# EAGLE board audio_spectrum (EAGLE 6.6.0)
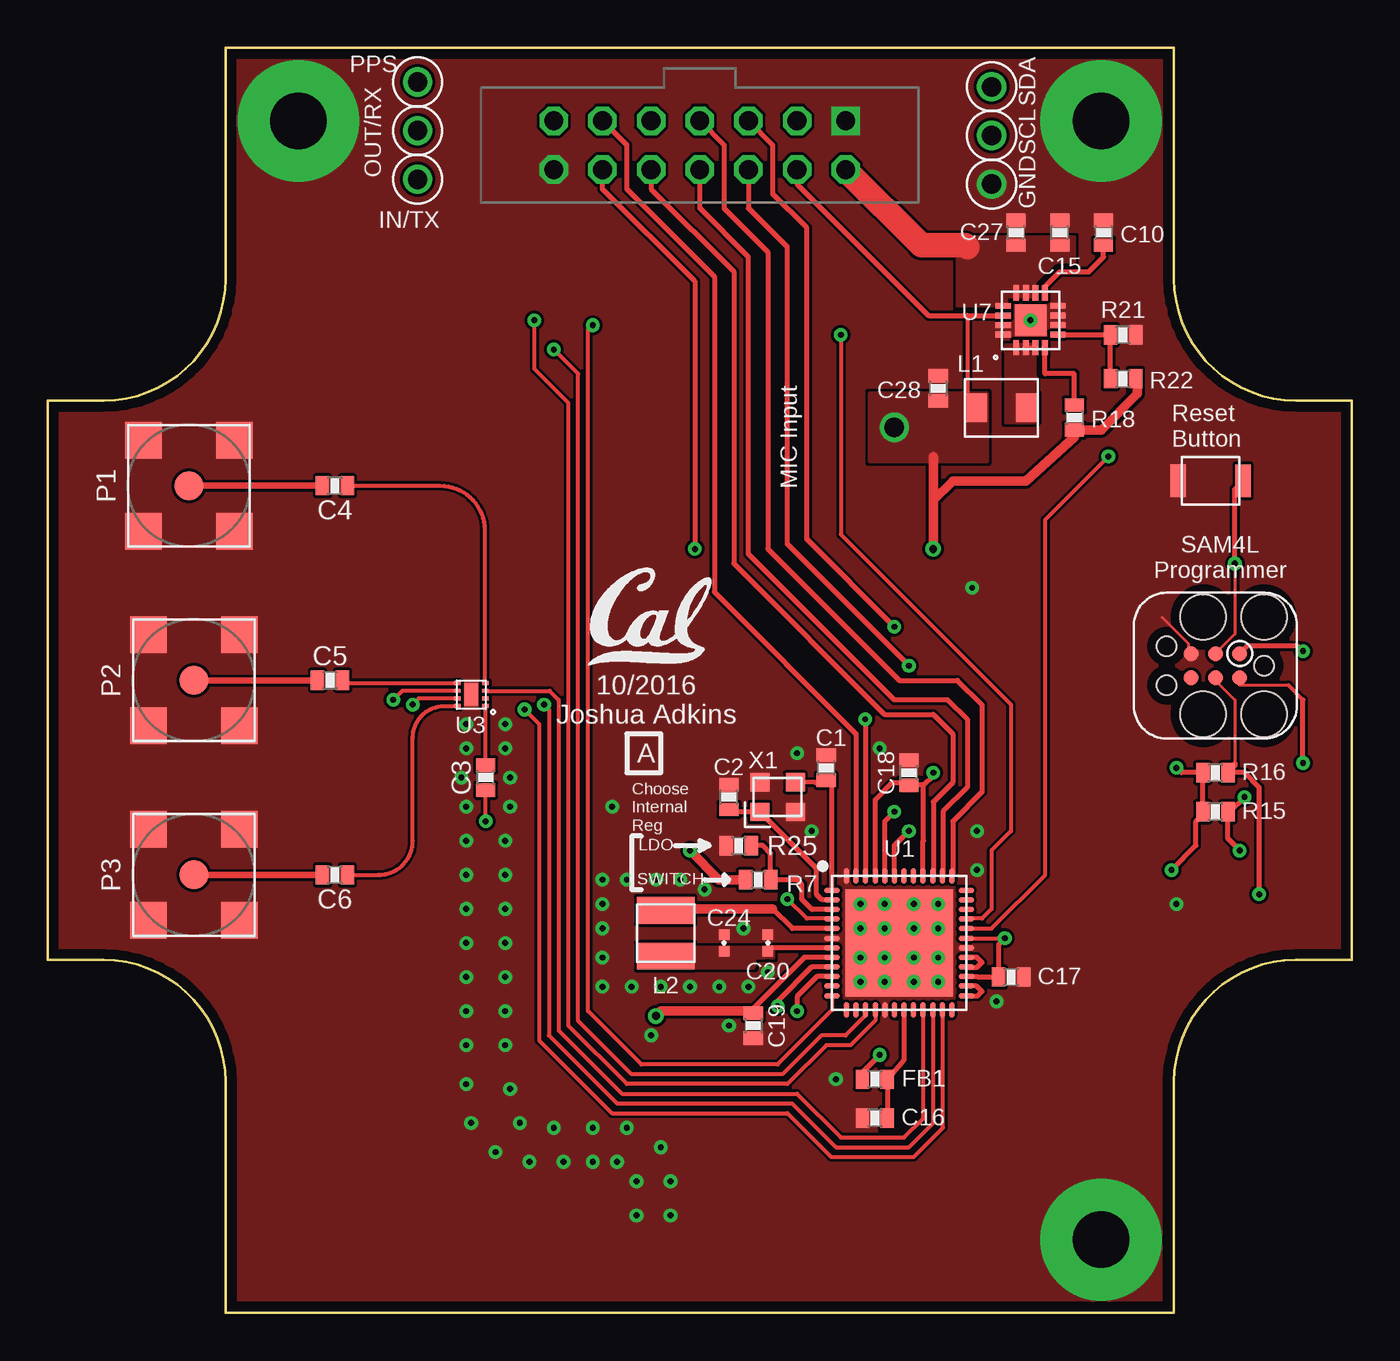
[diagram p0: board, top side]
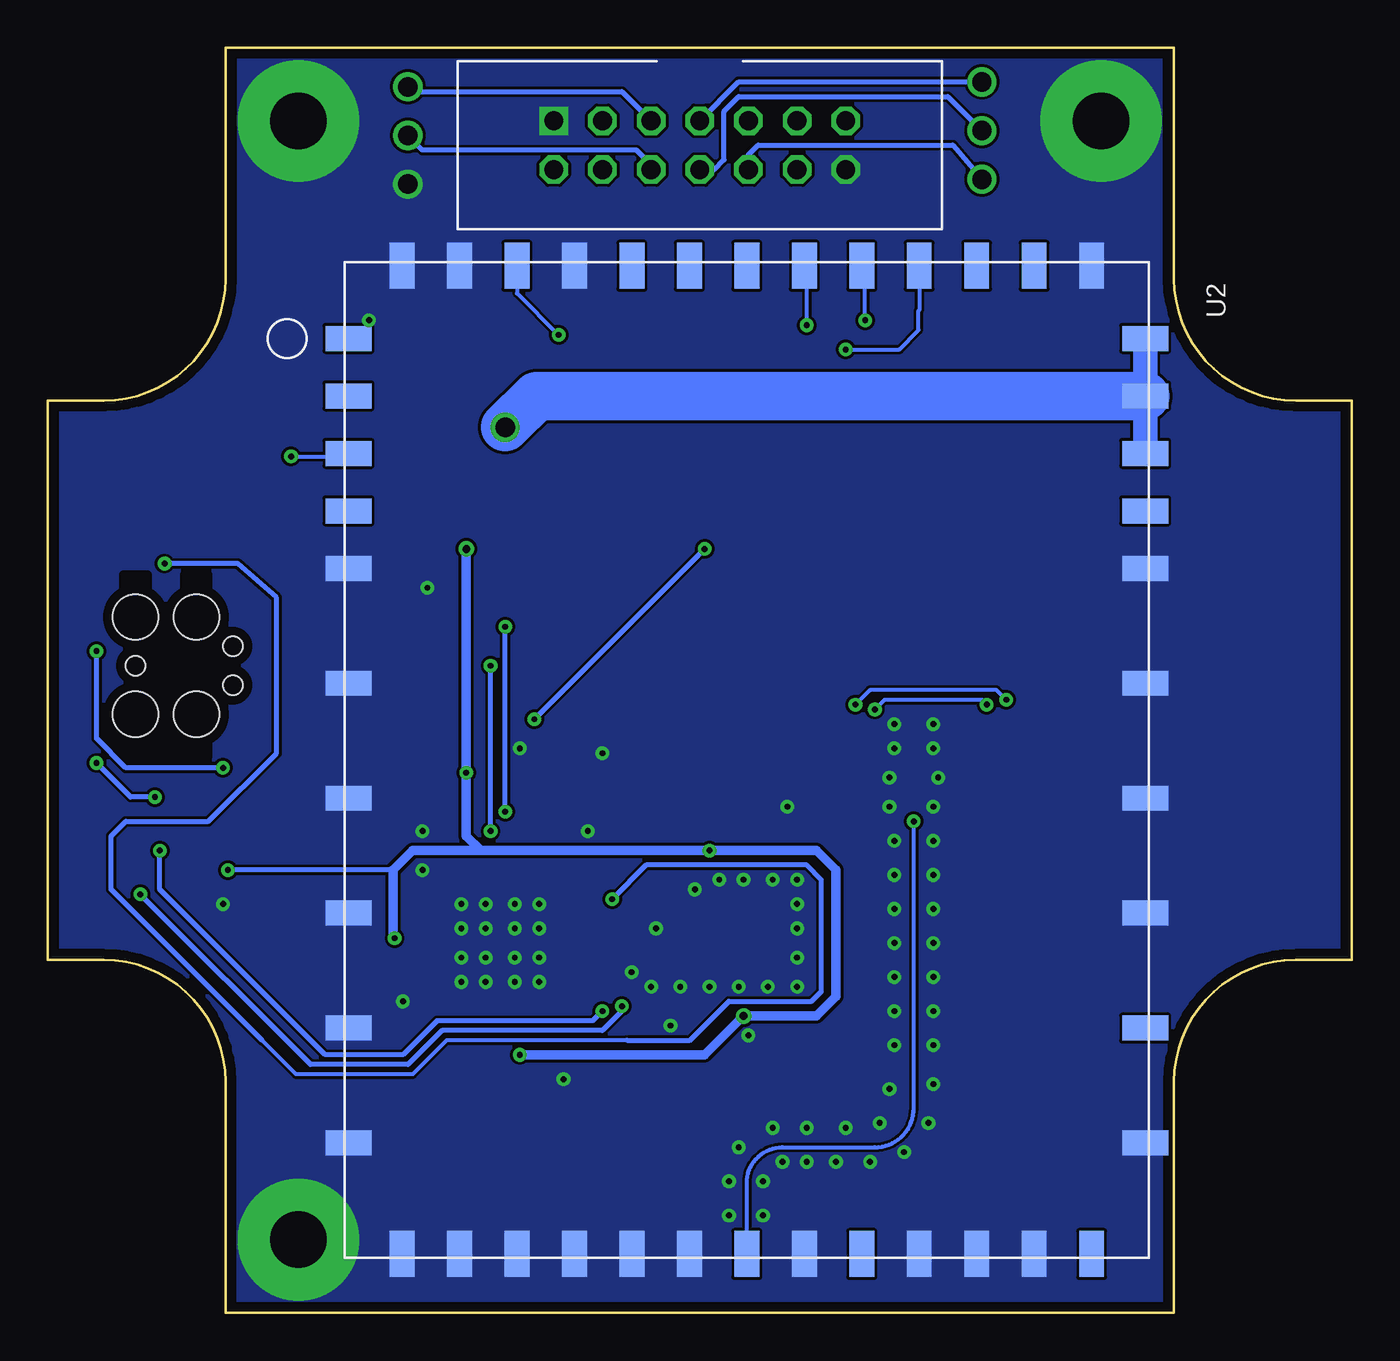
[diagram p1: board, bottom side, seen from below]

Size 68.07 x 66.04 mm. Coordinates in mm from the lower left corner, seen from the top.
Outline: 9.27,66.04 58.8,66.04 58.8,53.98 arc90 65.15,47.62 68.07,47.62 68.07,18.41 65.15,18.41 arc90 58.8,12.07 58.8,0 9.27,0 9.27,12.07 arc90 2.92,18.41 0,18.41 0,47.62 2.92,47.62 arc90 9.27,53.98 9.27,66.04
Copper layers (1*16): Top 0.0178mm / dielectric 59mil / Bottom 0.0178mm
Design rules "quickturn_co_kr_1oz": minimum track width 4mil, minimum drill 0.200659375mm, track to track 4mil, track to pad 4mil, pad to pad 4mil, via to via 4mil, smd to smd 4mil, copper to edge 20mil, drill to drill 16mil, minimum pad ring 8mil, minimum via ring 8mil, stop-mask expansion 3mil, vias tented up to drill 50mil, thermal gap 10mil

## Footprints (pad centres in the part's own frame; a part is rotated, then mirrored left to right if it is on the bottom)
0603_CAP = smd 0.7 x 1: 1 -0.65,0; 2 0.65,0
0402_CAP = smd 0.536 x 0.546: 1 -0.433,0; 2 0.433,0
MODULE_GENERIC = drill 0.991 square: 1 7.62,29.21 | drill 0.991 octagon: 2 7.62,26.67; 3 5.08,29.21; 4 5.08,26.67; 5 2.54,29.21; 6 2.54,26.67; 7 0,29.21; 8 0,26.67; 9 -2.54,29.21; 10 -2.54,26.67; 11 -5.08,29.21; 12 -5.08,26.67; 13 -7.62,29.21; 14 -7.62,26.67
TC2030-IDC = smd 0.787 x 0.787: 1 -1.27,-0.635; 2 -1.27,0.635; 3 0,-0.635; 4 0,0.635; 5 1.27,-0.635; 6 1.27,0.635 | hole 2.375: -2.54,2.54; 0.635,2.54; 0.635,-2.54; -2.54,-2.54 | hole 1.016: -2.54,0; 2.54,1.016; 2.54,-1.016
IHL-1212BZ-11 = smd 1.2 x 1.5: P$1 -1.35,0; P$2 1.35,0
1212 = smd 1.4 x 3: P$1 -1.2,0; P$2 1.2,0
SMA-J/PCB = smd 1.52 x 1.52: 1 0,0 | smd 1.91 x 1.91: 2 -2.375,-2.375; 3 2.375,-2.375; 4 2.375,2.375; 5 -2.375,2.375
0603-RES = smd 0.7 x 1: 1 -0.65,0; 2 0.65,0
B3U-1000P = smd 0.8 x 1.7: 1 -1.7,0; 2 1.7,0
TESTPOINT_0.040IN = drill 1.016: TESTPOINT 0,0
QFN-48-7MM = smd 0.8 x 0.28: 1 -3.5,2.75; 2 -3.5,2.25; 3 -3.5,1.75; 4 -3.5,1.25; 5 -3.5,0.75; 6 -3.5,0.25; 7 -3.5,-0.25; 8 -3.5,-0.75; 9 -3.5,-1.25; 10 -3.5,-1.75; 11 -3.5,-2.25; 12 -3.5,-2.75; 25 3.5,-2.75; 26 3.5,-2.25; 27 3.5,-1.75; 28 3.5,-1.25; 29 3.5,-0.75; 30 3.5,-0.25; 31 3.5,0.25; 32 3.5,0.75; 33 3.5,1.25; 34 3.5,1.75; 35 3.5,2.25; 36 3.5,2.75 | smd 0.28 x 0.8: 13 -2.75,-3.5; 14 -2.25,-3.5; 15 -1.75,-3.5; 16 -1.25,-3.5; 17 -0.75,-3.5; 18 -0.25,-3.5; 19 0.25,-3.5; 20 0.75,-3.5; 21 1.25,-3.5; 22 1.75,-3.5; 23 2.25,-3.5; 24 2.75,-3.5; 37 2.75,3.5; 38 2.25,3.5; 39 1.75,3.5; 40 1.25,3.5; 41 0.75,3.5; 42 0.25,3.5; 43 -0.25,3.5; 44 -0.75,3.5; 45 -1.25,3.5; 46 -1.75,3.5; 47 -2.25,3.5; 48 -2.75,3.5 | smd 5.6 x 5.6: THERMAL 0,0
MWSUB3G = smd 1.3 x 2.4: P$1 4,0.2; P$2 7,0.2; P$3 10,0.2; P$4 13,0.2; P$5 16,0.2; P$6 22,0.2; P$7 28,0.2; P$8 34,0.2; P$9 40,0.2; P$10 46,0.2; P$24 46,41.8; P$25 40,41.8; P$26 34,41.8; P$27 28,41.8; P$28 22,41.8; P$29 16,41.8; P$30 13,41.8; P$31 10,41.8; P$32 7,41.8; P$33 4,41.8 | smd 2.4 x 1.3: P$11 51.8,3; P$12 51.8,6; P$13 51.8,9; P$14 51.8,12; P$15 51.8,15; P$16 51.8,18; P$17 51.8,21; P$18 51.8,24; P$19 51.8,27; P$20 51.8,30; P$21 51.8,33; P$22 51.8,36; P$23 51.8,39; P$34 0.2,39; P$35 0.2,36; P$36 0.2,33; P$37 0.2,30; P$38 0.2,27; P$39 0.2,24; P$40 0.2,21; P$41 0.2,18; P$42 0.2,15; P$43 0.2,12; P$44 0.2,9; P$45 0.2,6; P$46 0.2,3
XDFN-8 = smd 0.35 x 0.2: 1 0.025,1.35; 2 0.025,0.95; 3 0.025,0.55; 4 0.025,0.15; 5 1.475,0.15; 6 1.475,0.55; 7 1.475,0.95; 8 1.475,1.35 | smd 0.7 x 1.2: P$1 0.75,0.75
TQFN-16/3MM = smd 0.3 x 0.8: 1 -0.75,-1.43; 2 -0.25,-1.43; 3 0.25,-1.43; 4 0.75,-1.43; 9 0.75,1.43; 10 0.25,1.43; 11 -0.25,1.43; 12 -0.75,1.43 | smd 0.8 x 0.3: 5 1.43,-0.75; 6 1.43,-0.25; 7 1.43,0.25; 8 1.43,0.75; 13 -1.43,0.75; 14 -1.43,0.25; 15 -1.43,-0.25; 16 -1.43,-0.75 | smd 1.63 x 1.63: GND 0,0
FHXXX = smd 1 x 0.95: 1 -0.925,-0.775; 2 0.925,-0.775; 3 0.925,0.775; 4 -0.925,0.775

## Placement (x,y rotation side)
C1  8pF  [0603_CAP]  40.64,28.45 90 top
C2  8pF  [0603_CAP]  35.56,26.92 90 top
C3  47pF  [0603_CAP]  22.86,27.94 90 top
C4  220pF  [0603_CAP]  14.99,43.18 180 top
C5  47pF  [0603_CAP]  14.73,33.02 0 top
C6  47pF  [0603_CAP]  14.99,22.86 180 top
C10  3.3nF  [0603_CAP]  55.12,56.39 270 top
C15  0.1uF  [0603_CAP]  52.83,56.39 90 top
C16  100nF  [0603_CAP]  43.18,10.16 180 top
C17  100nF  [0603_CAP]  50.29,17.53 0 top
C18  100nF  [0603_CAP]  44.96,28.19 90 top
C19  100nF  [0603_CAP]  36.83,14.99 270 top
C20  100nF  [0402_CAP]  37.59,19.3 90 top
C24  4.7uF  [0402_CAP]  35.31,19.3 90 top
C27  10uF  [0603_CAP]  50.55,56.39 90 top
C28  22uF  [0603_CAP]  46.48,48.26 270 top
FB1  1.5kΩ  [0603_CAP]  43.18,12.19 180 top
J1  MODULE_GENERIC  [MODULE_GENERIC]  34.04,33.02 0 top
J7  TC2030-JLINK-L  [TC2030-IDC]  60.96,33.78 180 top
L1  2.2uH  [IHL-1212BZ-11]  49.78,47.24 180 top
L2  22uH  [1212]  32.26,19.81 90 top
P1  MOLEX_73251-135X  [SMA-J/PCB]  7.37,43.18 90 top
P2  MOLEX_73251-135X  [SMA-J/PCB]  7.62,33.02 90 top
P3  MOLEX_73251-135X  [SMA-J/PCB]  7.62,22.86 90 top
R7  10k  [0603-RES]  37.08,22.61 180 top
R15  100k  [0603-RES]  60.96,26.16 180 top
R16  100k  [0603-RES]  60.96,28.19 180 top
R18  100k  [0603-RES]  53.59,46.74 270 top
R21  240k  [0603-RES]  56.13,51.05 180 top
R22  750k  [0603-RES]  56.13,48.77 0 top
R25  0  [0603-RES]  36.07,24.38 0 top
S1  B3U-1000P  [B3U-1000P]  60.71,43.43 0 top
TP11  TEST_POINT_0.040IN  [TESTPOINT_0.040IN]  49.28,58.93 0 top
TP12  TEST_POINT_0.040IN  [TESTPOINT_0.040IN]  49.28,64.01 0 top
TP13  TEST_POINT_0.040IN  [TESTPOINT_0.040IN]  49.28,61.47 0 top
TP14  TEST_POINT_0.040IN  [TESTPOINT_0.040IN]  19.3,59.18 0 top
TP15  TEST_POINT_0.040IN  [TESTPOINT_0.040IN]  19.3,61.72 0 top
TP16  TEST_POINT_0.040IN  [TESTPOINT_0.040IN]  19.3,64.26 0 top
U1  SAM4LC8AA  [QFN-48-7MM]  44.45,19.3 0 top
U2  MWSUB3G  [MWSUB3G]  52.58,54.86 270 bottom
U3  SKY13317  [XDFN-8]  22.86,33.02 180 top
U7  TLV62130  [TQFN-16/3MM]  51.31,51.82 0 top
U$2  [UCB_CAL_200MIL]  28.19,33.78 0 top
X1  16MHz  [FHXXX]  38.1,26.92 0 top

## Library data of the parts
C1 C2 = passives; DIGIKEY: 490-8230-1-ND
C3-C6 C16-C20 = passives; DIGIKEY: 490-10777-1-ND
C10 C15 C27 C28 R18 R21 R22 = passives
C24 = passives; DIGIKEY: 490-13252-1-ND
FB1 = passives; DIGIKEY: 490-5216-1-ND
J1 = signpost; DIGIKEY: S9170-ND
J7 = connector
L1 = passives; DIGIKEY: 541-1322-1-ND
L2 = signpost; DIGIKEY: 490-5350-1-ND
P1-P3 = connector; DIGIKEY: WM9357-ND
R7 R25 = passives; DIGIKEY: 1276-3431-1-ND
R15 R16 = passives; DIGIKEY: 1276-3432-1-ND
S1 = switches; DIGIKEY: SW1020CT-ND
TP11-TP16 = headers; DIGIKEY: 5001K-ND
U1 = chips; DIGIKEY: ATSAM4LC8AA-MU-ND
U2 = signpost
U3 = chips
U7 = chips; DIGIKEY: 296-35978-1-ND
U$2 = logos
X1 = crystals; DIGIKEY: FH1600015CT-ND

## Nets
3V3: C17.1 C18.1 C19.1 C28.2 FB1.2 J1.4 J7.1 L1.P$2 R7.2 R15.2 R16.2 R18.2 R22.2 U1.8 U1.27 U1.31 U1.40 U1.45 U2.P$31 U2.P$32 U2.P$33 U7.14
3VSWOUT: L1.P$1 U7.1 U7.2 U7.3
5V: C15.1 C27.1 J1.2 U7.10 U7.11 U7.12 U7.13
!CONTROLLER_RESET: J7.3 S1.2 U1.4
CONTROLLER_BUCK/LDO_N: R7.1 R25.2 U1.3
CONTROLLER_SWDCLK: J7.4 R16.1 U1.9
CONTROLLER_SWDIO: J7.2 R15.1 U1.10
CONTROLLER_XIN: C1.1 U1.1 X1.3
CONTROLLER_XOUT: C2.1 U1.2 X1.1
GND: C1.2 C2.2 C10.1 C15.2 C16.2 C17.2 C18.2 C19.2 C20.2 C24.2 C27.2 C28.1 J1.1 J1.14 J7.5 P1.2 P1.3 P1.4 P1.5 P2.2 P2.3 P2.4 P2.5 P3.2 P3.3 P3.4 P3.5 R21.1 R25.1 S1.1 TP11.TESTPOINT U1.6 U1.17 U1.30 U1.48 U1.THERMAL U2.P$5 U2.P$6 U2.P$7 U2.P$8 U2.P$9 U2.P$10 U2.P$11 U2.P$12 U2.P$13 U2.P$14 U2.P$15 U2.P$16 U2.P$18 U2.P$20 U2.P$21 U2.P$22 U2.P$24 U2.P$26 U2.P$27 U2.P$28 U2.P$29 U2.P$34 U2.P$43 U2.P$45 U2.P$46 U3.P$1 U7.6 U7.7 U7.8 U7.15 U7.16 U7.GND X1.2 X1.4
MOD_IN: J1.10 TP14.TESTPOINT U1.39
MOD_OUT: J1.8 TP15.TESTPOINT U1.38
N$1: C3.1 U2.P$17
N$2: C3.2 U3.1
N$3: C4.1 U3.4
N$4: C4.2 P1.1
N$5: C5.2 U3.5
N$6: C5.1 P2.1
N$7: C6.1 U3.8
N$8: C6.2 P3.1
N$32: C16.1 FB1.1 U1.19
N$34: C10.2 U7.9
N$36: R18.1 U7.4
N$37: R21.2 R22.1 U7.5
N$44: C20.1 C24.1 L2.P$1 U1.7
N$52: L2.P$2 U1.5
N$53: U1.28 U1.29
N$54: U1.25 U1.26
PPS: J1.7 TP16.TESTPOINT U1.37
RF_ANT1: U1.21 U3.3
RF_ANT2: U1.22 U3.6
RF_ANT3: U1.23 U3.7
RF_GPIO2: U1.32 U2.P$3
RF_GPIO3: U1.15 U2.P$37
RF_RESET: U1.33 U2.P$44
RF_RX: U1.16 U2.P$38
RF_TX: U1.12 U2.P$39
SCL: J1.5 TP12.TESTPOINT U1.44
SDA: J1.6 TP13.TESTPOINT U1.43
USB+: J1.11 U1.47
USB-: J1.12 U1.46

## Tracks (layer width: path | path; a pad name or v marks a point on that pad's centre or on a via)
3V3  (via drill 0.3, 0.41, 1.02)
  Top 0.203: J7.1 62.23,34.54 | U1.31 v49.97,19.55 | 48.01,52.07 48.01,47.67 L1.P$2
  Top 0.254: U7.14 48.01,52.07 45.97,52.07 39.12,58.93 J1.4 | U1.8 39.49,18.55 36.83,15.89 C19.1 | U1.45 43.2,26.78 44.1,27.69 44.96,27.69 C18.1 45.72,27.54 | U1.40 45.7,24.64 45.72,24.64 45.72,27.54 | 45.72,27.54 46.23,28.05 v46.23,28.19 | U1.27 48.54,17.55 48.57,17.53 C17.1 49.64,19.23 v49.97,19.55 | v58.67,23.11 59.94,24.38 59.94,25.65 60.2,25.91 60.2,26.56 R15.2 R16.2 59.18,28.19 v58.93,28.45 | v65.53,34.54 65.28,34.8 62.61,34.8 J7.1 | FB1.2 42.53,12.56 v43.43,13.46
  Top 0.508: R22.2 56.9,48.77 56.9,47.98 55.01,46.09 R18.2 53.59,45.72 51.05,43.43 47.24,43.43 46.23,42.42 | R7.2 35.05,22.61 v33.53,24.13 | v31.75,15.49 32,15.75 36.69,15.75 C19.1 | 46.23,42.42 v46.23,39.88 | 46.23,42.42 46.23,44.7
  Bottom 0.254: 50.04,23.11 v58.67,23.11 | v58.93,28.45 64.01,28.45 65.53,29.97 v65.53,34.54
  Bottom 0.508: 45.47,24.13 46.23,24.89 v46.23,28.19 v46.23,39.88 | 45.47,24.13 49.02,24.13 50.04,23.11 50.04,19.62 v49.97,19.55 | v43.43,13.46 33.78,13.46 v31.75,15.49 27.94,15.49 26.92,16.51 26.92,23.11 27.94,24.13 v33.53,24.13 45.47,24.13
  Bottom 1.27: U2.P$31 U2.P$32 U2.P$33
  Bottom 2.54: U2.P$32 42.56,47.86 v44.2,46.23
  pour Top (isolate 0.305, no thermals): 45.72,48.01 49.02,48.01 49.02,44.45 42.93,44.45 42.93,48.01
3VSWOUT
  Top 0.254: U7.2 U7.3
  Top 0.508: L1.P$1 51.06,47.24
  pour Top (isolate 0.305, no thermals): 50.04,46.48 50.04,50.55 51.56,50.55 51.56,46.48
5V
  Top 0.508: C27.1
  Top 1.27: J1.2 45.61,55.74 47.89,55.74 48.01,55.63
  pour Top (isolate 0.305, no thermals): 53.59,56.13 47.5,56.13 47.5,52.58 50.04,52.58 50.04,53.09 51.56,53.09 51.56,53.85 52.58,54.86 53.59,54.86
!CONTROLLER_RESET  (via drill 0.3)
  Top 0.152: v61.98,39.12 61.98,35.43 J7.3
  Top 0.203: U1.4 40.95,20.57 39.62,20.57 v38.61,21.59
  Top 0.254: v61.98,39.12 61.98,43 S1.2
  Bottom 0.203: 37.85,14.22 47.24,14.22 49.02,12.45 55.12,12.45 56.9,14.22
  Bottom 0.254: 56.9,14.22 64.77,22.1 64.77,24.89 64.01,25.65 59.69,25.65 56.13,29.21 56.13,37.34 58.17,39.12 v61.98,39.12 | 37.85,14.22 34.54,14.22 32.51,16.26 28.19,16.26 27.69,16.76 27.69,22.61 28.45,23.37 36.83,23.37 v38.61,21.59
CONTROLLER_BUCK/LDO_N
  Top 0.254: U1.3 39.91,21.05 39.37,21.59 39.37,22.35 39.12,22.61 R7.1 37.73,23.99 37.34,24.38 R25.2
CONTROLLER_SWDCLK  (via drill 0.3)
  Top 0.152: 60.96,33.02 61.98,32 61.98,28.7
  Top 0.203: J7.4 60.96,33.02
  Top 0.254: U1.9 39.88,18.05 38.1,16.26 v38.1,16 | v63.25,21.84 63.25,27.43 62.48,28.19 R16.1 61.98,28.56 61.98,28.7
  Bottom 0.254: v38.1,16 38.1,15.75 39.12,14.73 47.5,14.73 49.28,12.95 54.36,12.95 v63.25,21.84
CONTROLLER_SWDIO  (via drill 0.3)
  Top 0.152: J7.2 62.23,32.77 64.77,32.77
  Top 0.203: 64.77,32.77 65.53,32
  Top 0.254: U1.10 40.16,17.55 39.12,16.51 v39.12,15.75 | v62.23,24.13 61.61,24.75 R15.1 61.72,26.16 v62.48,26.92 | v65.53,28.7 65.53,32
  Bottom 0.254: v39.12,15.75 39.62,15.24 47.75,15.24 49.53,13.46 53.59,13.46 62.23,22.1 v62.23,24.13 | v62.48,26.92 63.75,26.92 v65.53,28.7
CONTROLLER_XIN
  Top 0.254: X1.3 40.04,27.69 40.53,27.69 C1.1 40.95,27.49 U1.1
CONTROLLER_XOUT
  Top 0.254: C2.1 36.07,26.15 X1.1 40.13,23.19 40.13,21.84 40.42,21.55 U1.2
GND  (via drill 0.3, 2.95 pad 6.35)
  Top 0.152: 59.56,34.42 59.56,34.93 58.17,36.32
  Top 0.254: J7.5 59.56,34.42
  other vias: 51.31,51.82 43.43,29.46 39.12,29.21 48.26,37.85 42.42,17.27 42.42,21.34 42.42,20.07 42.42,18.54 43.69,17.27 45.21,17.27 46.48,17.27 46.48,18.54 46.48,20.07 46.48,21.34 45.21,21.34 43.69,21.34 43.69,20.07 43.69,18.54 45.21,18.54 45.21,20.07 13.08,62.23 54.99,62.23 54.99,3.81 58.93,21.34 39.88,25.15 48.51,23.11 48.51,25.15 49.53,16.26 41.15,12.19 28.96,18.54 28.96,20.07 28.96,21.34 31.5,14.48 28.96,17.02 33.53,17.02 35.05,17.02 36.58,17.02 28.96,22.61 30.23,22.61 31.75,22.61 33.02,22.61 35.56,14.99 37.59,17.78 32,17.02 30.48,17.02 34.29,22.1 36.32,20.07 29.46,26.42 30.73,5.08 30.73,6.86 29.72,7.87 28.45,7.87 26.92,7.87 25.15,7.87 23.37,8.38 22.1,9.91 21.84,11.94 21.84,13.97 21.84,15.75 21.84,17.53 21.84,19.3 21.84,21.08 21.84,22.86 21.84,24.64 21.84,26.42 21.59,27.94 21.84,29.46 21.84,30.73 32.51,5.08 32.51,6.86 32,8.64 30.23,9.65 28.45,9.65 26.42,9.65 24.64,9.91 24.13,11.68 23.88,13.97 23.88,15.75 23.88,17.53 23.88,19.3 23.88,21.08 23.88,22.86 23.88,24.64 24.13,26.42 24.13,27.94 23.88,29.46 23.88,30.73
  pour Bottom (isolate 0.152, rank 2, no thermals): -2.29,74.42 79.25,74.42 79.25,-7.37 -2.29,-7.37
  pour Top (isolate 0.152, rank 2, no thermals): -2.29,74.93 80.26,74.93 80.26,-10.16 -2.29,-10.16
MOD_IN
  Top 0.254: U1.39 46.23,22.8 46.23,26.67 47.24,27.69 47.24,30.23 46.23,31.24 43.69,31.24 35.81,39.12 35.81,54.36 31.5,58.67 J1.10
  Bottom 0.254: J1.10 31.5,60.45 30.99,60.96 20.83,60.96 TP14.TESTPOINT
MOD_OUT
  Top 0.254: U1.38 46.74,22.8 46.74,26.16 48.01,27.43 48.01,30.99 46.99,32 44.2,32 36.58,39.62 36.58,55.12 34.04,57.66 J1.8
  Bottom 0.254: J1.8 33.27,59.69 32.77,60.2 32.77,62.74 32,63.5 21.08,63.5 TP15.TESTPOINT
N$1  (via drill 0.3)
  Top 0.203: v22.86,25.65 C3.1
  Bottom 0.203: U2.P$17 31.58,6.78 arc90 29.72,8.64 24.89,8.64 arc-90 22.86,10.67 v22.86,25.65
N$2
  Top 0.203: C3.2 22.86,31.65 arc90 U3.1
N$3
  Top 0.203: C4.1 20.47,43.18 arc-90 22.81,40.84 22.81,32.9 arc90 U3.4
N$4
  Top 0.33: P1.1 C4.2
N$5
  Top 0.203: C5.2 15.38,32.98 arc90 15.49,32.87 U3.5 arc90 U3.5
N$6
  Top 0.33: P2.1 C5.1
N$7
  Top 0.203: C6.1 17.27,22.86 arc90 19.05,24.64 19.05,30.02 arc-90 20.7,31.67 U3.8 arc-90 U3.8
N$8
  Top 0.33: P3.1 C6.2
N$32
  Top 0.254: U1.19 44.7,13.21 FB1.1 C16.1
N$34
  Top 0.254: U7.9 52.07,53.59 52.83,54.36 54.36,54.36 55.12,55.12 C10.2
N$36
  Top 0.254: R18.1 53.59,49.02 52.06,49.02 U7.4
N$37
  Top 0.254: R22.1 R21.2 55.48,51.07 U7.5
N$44
  Top 0.254: U1.7 37.52,19.05 C20.1
  pour Top (isolate 0.305, no thermals): 30.99,18.03 30.99,19.05 37.85,19.05 37.85,18.54 36.83,18.54 36.83,18.03
N$52
  Top 0.254: L2.P$2 32.44,20.83 32.7,21.08 | U1.5 38.87,20.05 37.85,21.08
  Top 0.508: 37.85,21.08 32.7,21.08
N$53
  Top 0.254: U1.28 47.97,18.03 48.51,18.03 48.77,18.29 48.5,18.55 U1.29
N$54
  Top 0.254: U1.25 48.56,16.55 48.77,16.76 48.48,17.05 U1.26
PPS
  Top 0.254: J1.7 35.31,60.96 35.31,57.66 37.59,55.37 37.59,39.88 44.45,33.02 47.5,33.02 48.77,31.75 48.77,27.18 47.24,25.65 47.24,22.8 U1.37
  Bottom 0.254: J1.7 32,64.26 TP16.TESTPOINT
RF_ANT1
  Top 0.203: U3.3 26.2,32.47 26.67,32 26.67,14.73 29.97,11.43 39.12,11.43 41.4,9.14 44.7,9.14 45.72,10.16 45.72,15.78 U1.21
RF_ANT2  (via drill 0.3)
  Top 0.203: U3.6 18.5,32.47 v18.03,32 | v25.91,31.75 26.16,31.5 26.16,14.48 29.72,10.92 38.86,10.92 41.15,8.64 44.96,8.64 46.23,9.91 46.23,15.78 U1.22
  Bottom 0.203: v18.03,32 18.54,32.51 25.15,32.51 v25.91,31.75
RF_ANT3  (via drill 0.3)
  Top 0.203: U3.7 19.37,32.07 v19.05,31.75 | v24.89,31.5 25.65,30.73 25.65,14.22 29.46,10.41 38.61,10.41 40.89,8.13 45.21,8.13 46.74,9.65 46.74,15.77 U1.23
  Bottom 0.203: v19.05,31.75 19.3,32 24.38,32 v24.89,31.5
RF_GPIO2  (via drill 0.3)
  Top 0.203: U1.32 49.26,20.05 52.07,22.86 52.07,41.4 v55.37,44.7
  Bottom 0.203: v55.37,44.7 52.54,44.7 U2.P$3
RF_GPIO3  (via drill 0.3)
  Top 0.203: U1.15 42.7,15.52 41.66,14.48 40.39,14.48 38.35,12.45 30.48,12.45 27.69,15.24 27.69,49.02 v26.42,50.29
  Bottom 0.203: U2.P$37 22.58,52.35 22.61,52.32 22.61,51.31 23.62,50.29 v26.42,50.29
RF_RESET  (via drill 0.3)
  Top 0.203: v41.4,51.05 41.4,40.64 50.29,31.75 50.29,25.15 49.28,24.13 49.28,21.08 48.77,20.57 47.97,20.57 U1.33
  Bottom 0.203: U2.P$44 43.58,53.23 v41.4,51.05
RF_RX  (via drill 0.3)
  Top 0.203: U1.16 43.2,15.26 41.91,13.97 40.64,13.97 38.61,11.94 30.23,11.94 27.18,14.99 27.18,47.5 25.4,49.28 v25.4,51.82
  Bottom 0.203: v25.4,51.82 25.4,54.49 U2.P$38
RF_TX  (via drill 0.3)
  Top 0.203: U1.12 40.95,15.8 38.1,12.95 30.99,12.95 28.19,15.75 28.19,51.31 v28.45,51.56
  Bottom 0.203: v28.45,51.56 28.45,54.53 U2.P$39
SCL  (via drill 0.3)
  Top 0.254: J1.5 37.85,60.96 37.85,58.42 39.62,56.64 39.62,40.39 v44.2,35.81 | U1.44 43.7,25.65 v44.2,26.16
  Bottom 0.254: v44.2,26.16 v44.2,35.81 | TP12.TESTPOINT 49.02,63.75 38.1,63.75 J1.5
SDA  (via drill 0.3)
  Top 0.254: J1.6 36.58,57.66 38.61,55.63 38.61,40.13 v44.96,33.78 | U1.43 44.2,24.38 v44.96,25.15
  Bottom 0.254: v44.96,25.15 v44.96,33.78 | J1.6 36.58,59.94 37.34,60.71 48.51,60.71 TP13.TESTPOINT
USB+
  Top 0.254: U1.47 42.2,30.23 34.8,37.63 34.8,54.1 30.23,58.67 30.23,60.96 J1.11
USB-  (via drill 0.3)
  Top 0.254: v42.67,30.99 42.7,30.48 U1.46 | v33.78,39.88 33.78,53.85 28.96,58.67 J1.12
  Bottom 0.254: v33.78,39.88 v42.67,30.99

## Text on the board
tPlace: PPS | OUT/RX | SDA | SCL | GND | IN/TX | Reset / Button | A | Choose / Internal / Reg | LDO | SWITCH
tNames: MIC Input | SAM4L / Programmer | 10/2016 | Joshua Adkins